# Altium PCB golgi_bot_H_bridge.PcbDoc
Units mil, origin at the board's own origin, x right, y up, seen from the top; angles counter-clockwise.
Board outline 1900 x 1900 mil, 2 copper layers (Top Layer, Bottom Layer); 14 components, 17 nets, 68 pads, 61 vias.
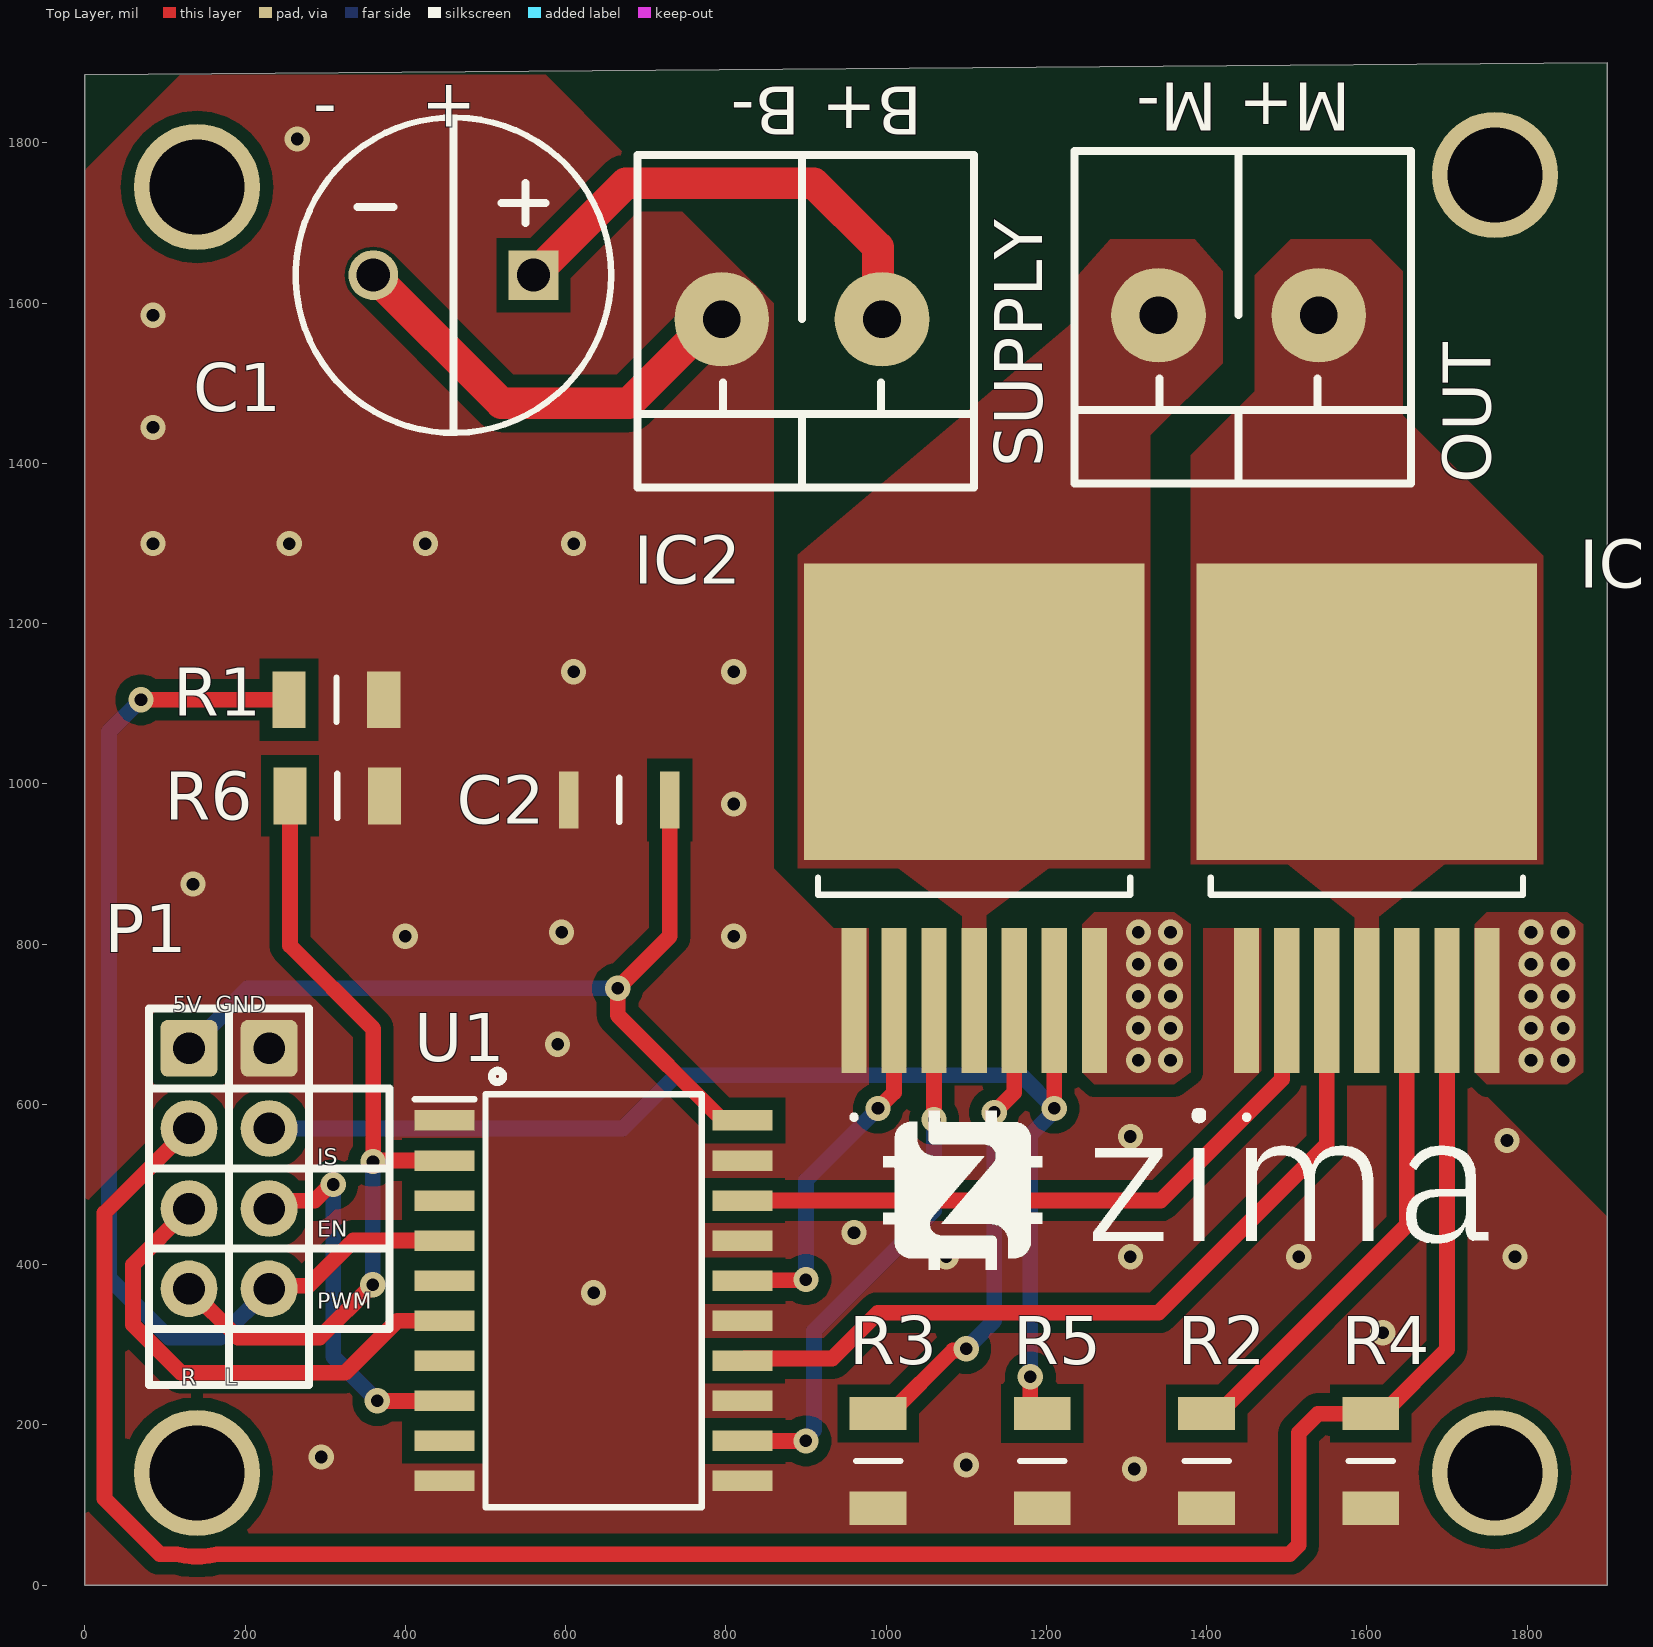
[diagram p0: Top Layer view]
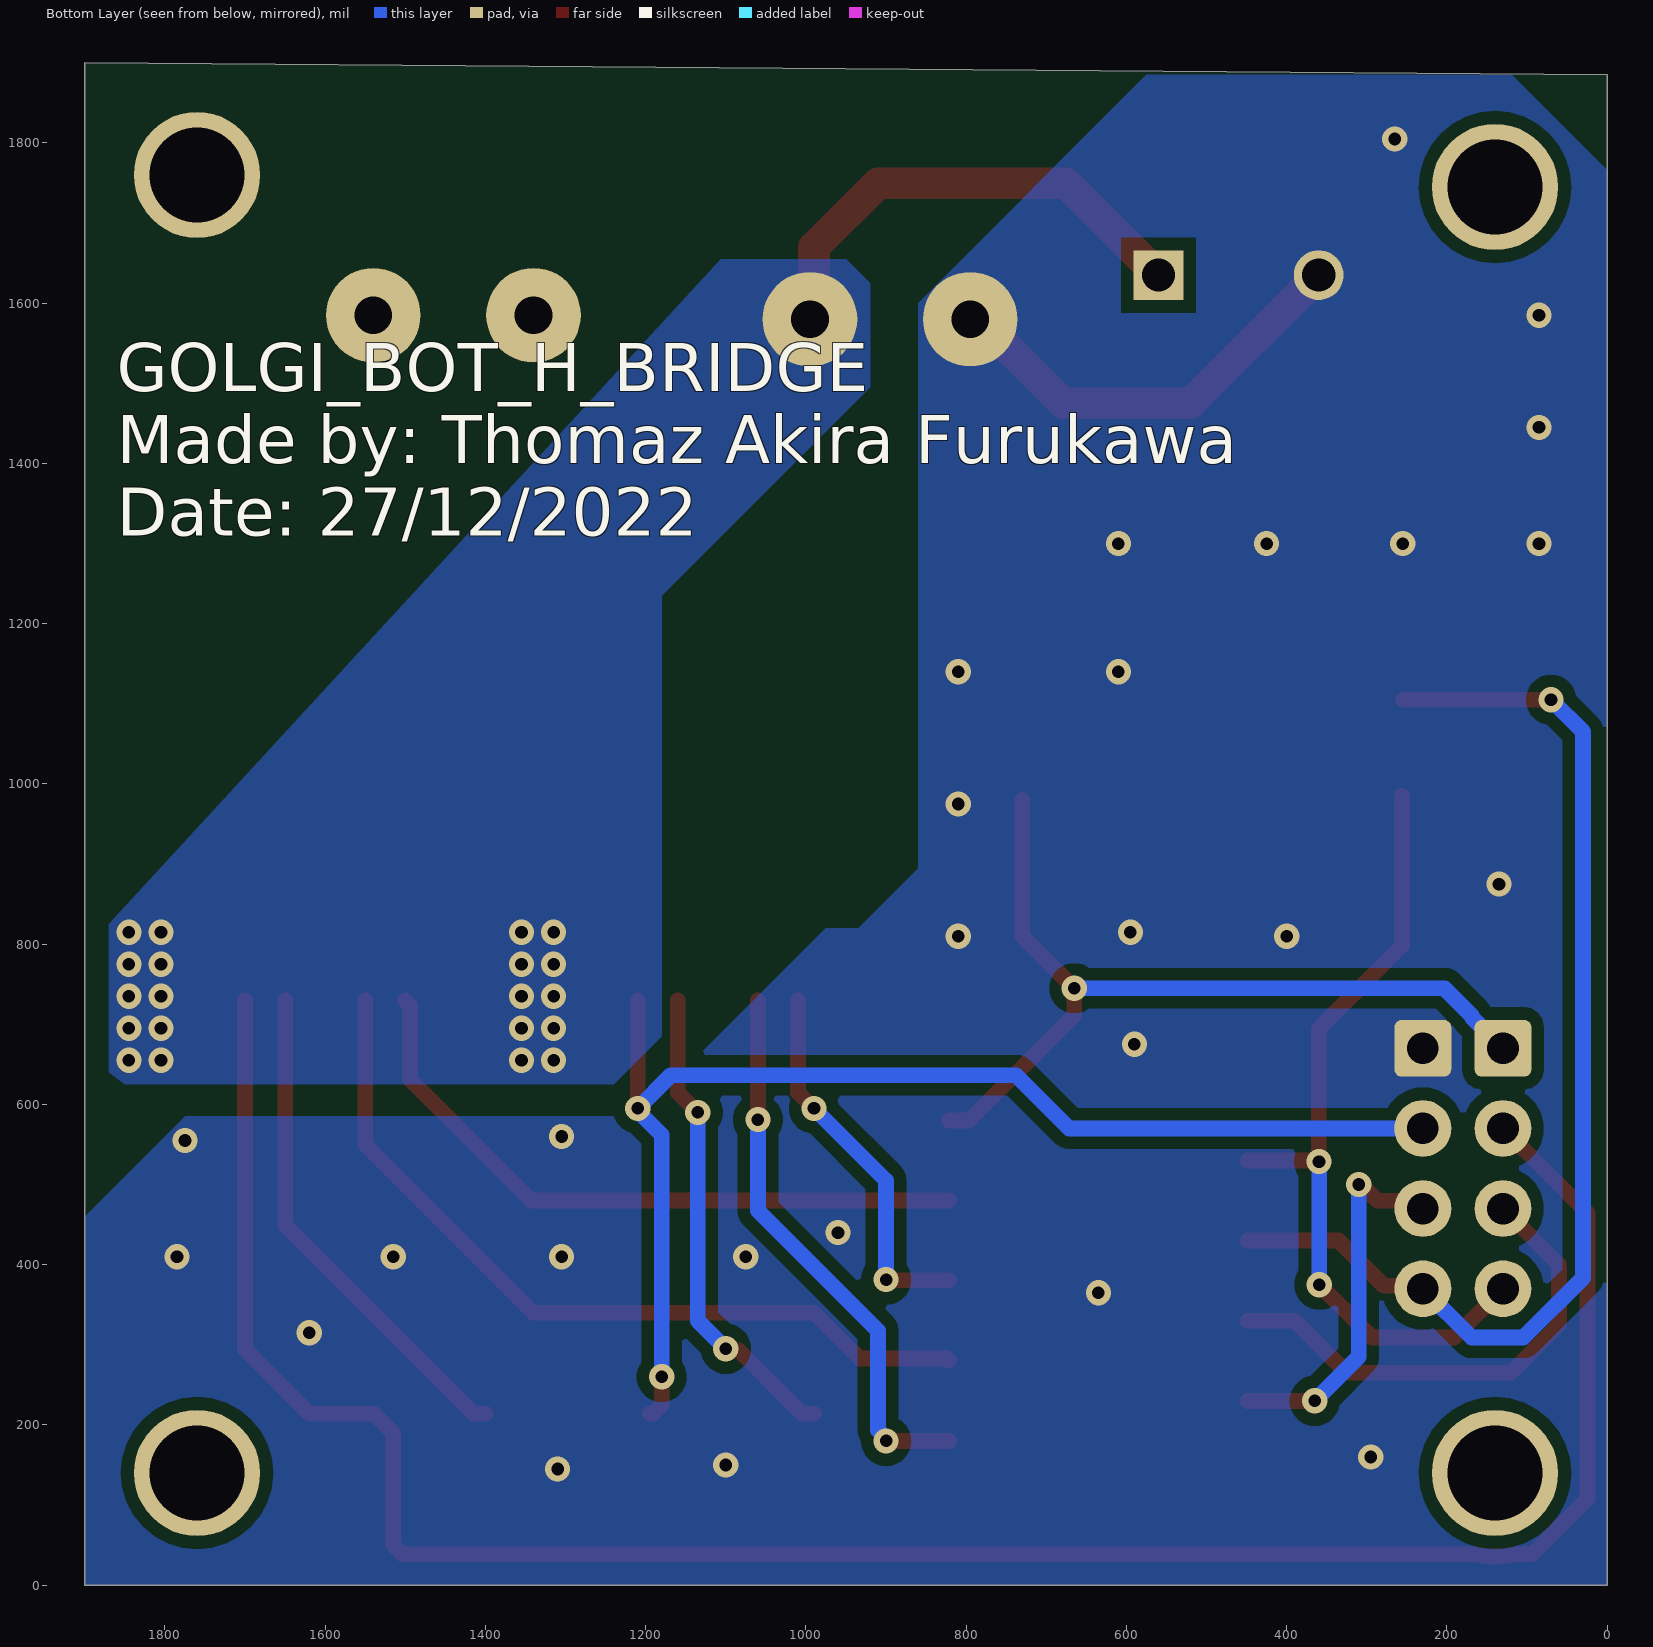
[diagram p1: Bottom Layer view, seen from below]
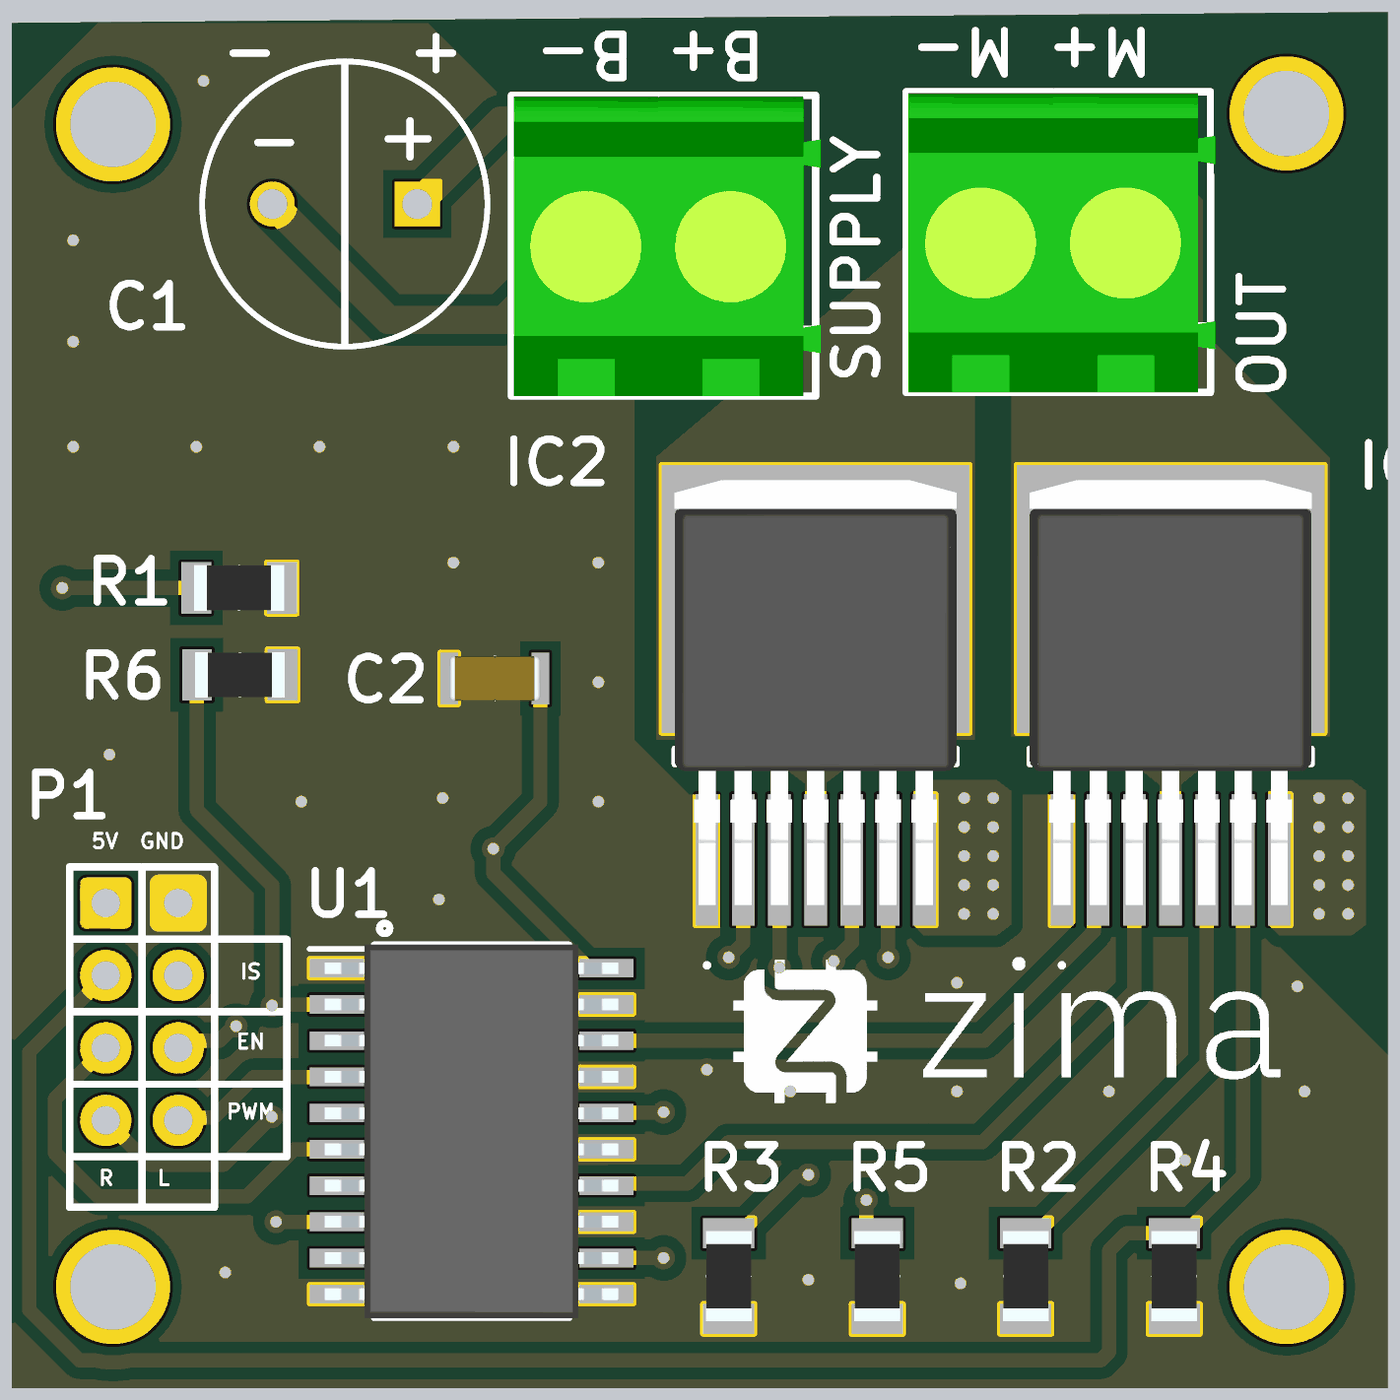
[diagram p2: 3D render of the assembled board from above, using the file's embedded part models]

## Layer stack, top to bottom
Top Solder: solder mask 0.4, Solder Resist, Dk 3.5
Top Layer: signal copper 1.4
Dielectric 1: dielectric 12.6, FR-4, Dk 4.8
Bottom Layer: signal copper 1.4
Bottom Solder: solder mask 0.4, Solder Resist, Dk 3.5

## Board outline
0,0 1900,0 1900,1900 0,1885

## Design rules (kind name [scope] priority, off if disabled: settings)
Clearance [All] p1: gap=15.75 ignorepadtopadclearanceinfootprint=FALSE
ComponentClearance [All] p1: gap=0 collisioncheckmode=3 verticalgap=0 showdistances=FALSE
MinimumSolderMaskSliver [All] p1: minsoldermaskwidth=11.81
PlaneConnect [All] p1: planeconnectstyle=Relief reliefexpansion=20 reliefentries=4 reliefconductorwidth=19.68 reliefairgap=10
PolygonConnect PolygonConnect_4 [InNet('B+')] p1: connectstyle=Direct reliefconductorwidth=10 reliefentries=4 polygonreliefangle="90 Angle" airgapwidth=10
PolygonConnect PolygonConnect_3 [InNet('M+')] p2: connectstyle=Direct reliefconductorwidth=10 reliefentries=4 polygonreliefangle="90 Angle" airgapwidth=10
PolygonConnect PolygonConnect_2 [InNet('M-')] p3: connectstyle=Direct reliefconductorwidth=10 reliefentries=4 polygonreliefangle="90 Angle" airgapwidth=10
PolygonConnect PolygonConnect_1 [All vs InNet('GND')] p4: connectstyle=Direct reliefconductorwidth=0 reliefentries=4 polygonreliefangle="45 Angle" airgapwidth=10
PolygonConnect [All] p5: thpad.connectstyle=Relief thpad.reliefconductorwidth=19.68 thpad.reliefentries=4 thpad.polygonreliefangle="45 Angle" thpad.airgapwidth=10 smdpad.connectstyle=Relief smdpad.reliefconductorwidth=19.68 smdpad.reliefentries=4 smdpad.polygonreliefangle="90 Angle" smdpad.airgapwidth=10 via.connectstyle=Relief via.reliefconductorwidth=19.68 via.reliefentries=4 via.polygonreliefangle="45 Angle" via.airgapwidth=10
RoutingVias [All] p1: holewidth=28 width=50 viastyle="Through Hole" minholewidth=28 minwidth=50 maxholewidth=28 maxwidth=50
SilkToSilkClearance [All] p1: silktosilkclearance=5
SilkToSolderMaskClearance [IsPad] p1: minsilkscreentomaskgap=0 clearancetoexposedcopper=TRUE
SolderMaskExpansion [All] p1: expansion=4 istentingtop=FALSE
Width [All] p1: maxlimit=39.37 minlimit=19.68 preferedwidth=19.68 minimp=50.000000 maximp=50.000000 favimp=50.000000
25 further rules are at their usual default settings.

## Components (designator, comment, footprint, x,y, rotation, side; value= is the part's Value field where it differs from the comment)
C1 "330uF 50V" CAPPRD750W85D1600H1650 560,1635 r180 top
C2 "1uF 50V" CAPC3216X180N 667.01,980 r0 top
IC1 "BTS7960B" BTS7960B 1600,1090 r0 top
IC2 "BTS7960B" BTS7960B 1110,1090 r0 top
OUT "KRE2vias" KRE2-2vias 1440,1585 r0 top
P1 "PIN BAR 2X4" "MALE PIN BAR 2X4" 230,670 r270 top
R1 "10K" RESC3216X60N 314.06,1105 r0 top
R2 "10K" RESC3216X60N 1400,155 r270 top
R3 "10K" RESC3216X60N 990,155 r90 top
R4 "10K" RESC3216X60N 1605,155 r270 top
R5 "10K" RESC3216X60N 1195,155 r90 top
R6 "10K" RESC3216X60N 315,985 r0 top
SUPPLY "KRE2vias" KRE2-2vias 895,1580 r0 top
U1 "74HC244D" SOIC127P1030X250-20N 635,355 r0 top

## Footprints (in the part's own frame and the unit in brackets; to place one, negate y for a bottom-side part, rotate by r counter-clockwise, add the part's x,y. Pads: shape width x height; smd on the part's side, far side on the other; paste and mask are expansions set on the pad)
BTS7960B [mm]
  rect 0.8x4.6 smd: 1(-3.81,-9.15) 2(-2.54,-9.15) 3(-1.27,-9.15) 4(0,-9.15) 5(1.27,-9.15) 6(2.54,-9.15) 7(3.81,-9.15)
  rect 10.8x9.4 smd: 8(0,0)
  silkscreen extent -4.95,-12.9 4.95,-5.25, body extent -4.95,-10.74 4.95,4.16, height 4.4
CAPC3216X180N [mm]
  rect 0.62x1.82 smd: 1(-1.6,0) 2(1.6,0)
  silkscreen extent 0,-0.7 0,0.7, body extent -1.6,-0.8 1.6,0.8, height 1.8
CAPPRD750W85D1600H1650 [mm]
  rect 1.575x1.575 hole 1.05: 1(0,0)
  round 1.575 hole 1.05: 2(5.08,0)
  silkscreen extent -2.46,-5 7.54,5
KRE2-2vias [mm]
  round 3 hole 1.2: 1(-2.54,0) 2(2.54,0)
  silkscreen extent -5.21,-5.33 5.46,5.21, body extent -5.13,-5.33 5.63,5.17, height 14.35
"MALE PIN BAR 2X4" [mm]
  rrect25% 1.8x1.8 hole 1: 1(0,0) 5(0,-2.54)
  round 1.8 hole 1: 2(2.54,0) 3(5.08,0) 4(7.62,0) 6(2.54,-2.54) 7(5.08,-2.54) 8(7.62,-2.54)
  silkscreen extent -1.27,-3.81 8.89,1.27
RESC3216X60N [mm]
  rect 1.05x1.8 smd: 1(-1.5,0) 2(1.5,0)
  silkscreen extent 0,-0.7 0,0.7, body extent -1.58,-0.8 1.58,0.8, height 0.6
SOIC127P1030X250-20N [mm]
  rect 1.9x0.65 smd: 1(-4.725,5.715) 2(-4.725,4.445) 3(-4.725,3.175) 4(-4.725,1.905) 5(-4.725,0.635) 6(-4.725,-0.635) 7(-4.725,-1.905) 8(-4.725,-3.175) 9(-4.725,-4.445) 10(-4.725,-5.715) 11(4.725,-5.715) 12(4.725,-4.445) 13(4.725,-3.175) 14(4.725,-1.905) 15(4.725,-0.635) 16(4.725,0.635) 17(4.725,1.905) 18(4.725,3.175) 19(4.725,4.445) 20(4.725,5.715)
  silkscreen extent -5.68,-6.55 3.42,6.55, body extent -5.15,-6.55 5.15,6.55, height 2.5

## Part data
C1: library part "Capacitor eletrolítico", "capacitor 330uf 50V", Manufacturer_Name=Panasonic, Manufacturer_Part_Number=EEU-TA1H331S, Datasheet Link=http://industrial.panasonic.com/cdbs/www-data/pdf/RDF0000/ABA0000C1212.pdf, Height=16.5mm
C2: library part "Capacitor Cerâmico 1206", "Capacitor", Manufacturer_Name=TDK, Manufacturer_Part_Number=C3216X5R0J226M160AA, Mouser Part Number=810-C3216X5R0J226M-6, Datasheet Link=https://product.tdk.com/info/en/catalog/datasheets/mlcc_commercial_midvoltage_en.pdf, Height=1.8mm, Mouser Price/Stock=https://www.mouser.com/Search/Refine.aspx?Keyword=810-C3216X5R0J226M-6
IC1 IC2: "Integrated Circuit", Manufacturer_Name="Rochester Electronics", Height=4.4mm, Manufacturer_Part_Number=BTS7960B
OUT SUPPLY: "Conector 2 vias", Descrição="Conector KRE 2 vias 180º", Encapsulamento="PTH - 180º", Modelo="2 vias - 180º"
P1: library part "Male pin bar 2x4", Manufacturer=Cromax, Manufacturer Part Number=-, Accessory Type=-, Brand=Cromax, Category="Headers & Wire Housings", ComponentLink1Description=-, ComponentLink1URL=-, Contact Gender="Pin (Female)", Contact Plating=Gold, Contact Type=-, Minimum Order Quantity=1, Mounting Angle=Vertical, Mounting Style="Straight Pin", Number of Positions="40 Position", Number of Rows="1 Row", Pitch="2 mm", Pricing 1="1=1.60, 2=0.80 (BRL)", Product=Headers, Product Category=Accessories, Reeling=False, RoHS="RoHS Compliant", RoHS - Mouser=Y, Row Spacing=-, Stock 1=14, Supplier 1=-, Supplier Part Number 1=-, Termination Style="Through Hole", Type=Breakaway
R1 R2 R3 R4 R5 R6: library part "Resistor 1206", Arrow Part Number=CRCW12064K70FKEA, Manufacturer_Name=Vishay, Mouser Part Number=71-CRCW1206-4.7K-E3, Arrow Price/Stock=https://www.arrow.com/en/products/crcw12064k70fkea/vishay, Datasheet Link=http://docs-emea.rs-online.com/webdocs/13ec/0900766b813ecc08.pdf, Height=0.6mm, Manufacturer_Part_Number=CRCW12064K70FKEA, Mouser Price/Stock=https://www.mouser.co.uk/ProductDetail/Vishay-Dale/CRCW12064K70FKEA?qs=1vm4qhDHCvlKJmatsKzyFQ%3D%3D
U1: "Integrated Circuit", Manufacturer_Name=Toshiba, Mouser Part Number=757-74HC244D, Arrow Part Number=74HC244D, Arrow Price/Stock=https://www.arrow.com/en/products/74hc244d/toshiba?region=nac, Datasheet Link=https://www.arrow.com/en/products/74hc244d/toshiba, Height=2.5mm, Manufacturer_Part_Number=74HC244D, Mouser Price/Stock=https://www.mouser.co.uk/ProductDetail/Toshiba/74HC244D?qs=7EBvPakHacWwVm6mPM9mPg%3D%3D

## Free pads (board coordinates)
  round 157.48 hole 118.11: 1(140,140) 1(140,1745) 1(1760,140) 1(1760,1760)

## Via types
v1: diameter 31.5, hole 15.75, Top Layer to Bottom Layer, tented both sides, 61 vias

## Nets (pads, with @x,y where several pads share a name; then routed paths per layer and width w, separated by ;. In a path a pad name is that pad's centre, name@x,y a point inside that pad or via, vN(x,y) a via of type N, cw(c..) or ccw(c..) an arc to the next point about the centre after c; other vN are vias at no path point)
+5: C2.2 P1.5 U1.20 | length 1073.1
  Top Layer w19.68: C2.2 730,810 v1(665,745) 665,711.42 793.46,582.95 796.42,580 U1.20
  Bottom Layer w19.68: P1.5 168.98,708.98 168.98,710.84 203.13,745 v1(665,745)
B+: C1.1 IC1.7 IC2.7 SUPPLY.2 | length 607
  Top Layer w39.37: C1.1 675,1750 910,1750 989.93,1670.07 989.93,1595.07 SUPPLY.2@1005,1580
  other v1: 1315,655 1355,655 1805,655 1845,655 1315,695 1355,695 1805,695 1845,695 1315,735 1355,735 1805,735 1845,735 1315,775 1355,775 1805,775 1845,775 1315,815 1355,815 1805,815 1845,815
EN_L: P1.3 U1.8 | length 469.2
  Top Layer w19.68: P1.3 239.79,479.79 286.6,479.79 306.8,500 v1(310,500) ; v1(365,230) U1.8
  Bottom Layer w19.68: v1(310,500) 310,285 v1(365,230)
EN_L*: IC2.3 U1.12 | length 695
  Top Layer w19.68: U1.12 v1(900,180) ; v1(1060,581.04) IC2.3
  Bottom Layer w19.68: v1(900,180) 900,183.2 910,193.2 910,317.5 1060,467.5 v1(1060,581.04)
EN_R: P1.7 U1.6 | length 614.7
  Top Layer w19.68: P1.7 60,400 60,325 120,265 325,265 390,330 U1.6
EN_R*: IC1.3 U1.14 | length 1020.6
  Top Layer w19.68: U1.14 823.98,282.95 932.95,282.95 990,340 1340,340 1550,550 IC1.3
GND: C1.2 C2.1 IC1.1 IC2.1 P1.1 R1.2 R2.2 R3.1 R4.2 R5.1 R6.2 SUPPLY.1 U1.1 U1.10 U1.11 U1.13 U1.15 U1.17 U1.19 | length 554.8
  Top Layer w39.37: C1.2 520,1475 678.69,1475 783.69,1580 SUPPLY.1@805,1580
  other v1: 1310,145 1100,150 295,160 1620,315 635,365 1075,410 1305,410 1515,410 1785,410 960,440 1775,555 1305,560 590,675 400,810 810,810 595,815 135,875 810,975 610,1140 810,1140 85,1300 255,1300 425,1300 610,1300 85,1445 85,1585 265,1805
L_IS: IC2.6 P1.2 R5.2 | length 1561.4
  Top Layer w19.68: v1(1180,260) 1180,224.88 1190.83,214.06 R5.2 ; v1(1210,595) IC2.6
  Bottom Layer w19.68: P1.2 671.49,570 737.83,636.34 1168.66,636.34 v1(1210,595) 1210,591.8 1180,561.8 v1(1180,260)
M+: IC1.4 IC1.8 OUT.2
M-: IC2.4 IC2.8 OUT.1
NetIC1_5: IC1.5 R2.1 | length 627.9
  Top Layer w19.68: R2.1 1414.76,214.06 1650,449.29 IC1.5
NetIC2_5: IC2.5 R3.2 | length 603.1
  Top Layer w19.68: R3.2 1004.76,214.06 1083.45,292.74 1097.74,292.74 v1(1100,295) ; v1(1135,590) 1160,615 IC2.5
  Bottom Layer w19.68: v1(1100,295) 1135,330 v1(1135,590)
PWM_L: P1.4 R1.1 U1.4 | length 1422.9
  Top Layer w19.68: v1(70,1105) R1.1 ; P1.4 233.75,373.75 278.75,373.75 335,430 U1.4
  Bottom Layer w19.68: v1(70,1105) 30,1065 30,383.7 104.72,308.98 168.98,308.98 P1.4
PWM_L*: IC2.2 U1.16 | length 473.5
  Top Layer w19.68: U1.16 821.69,380.67 899.33,380.67 v1(900,381.34) ; v1(990,595) 1010,615 IC2.2
  Bottom Layer w19.68: v1(900,381.34) 900,505 v1(990,595)
PWM_R: P1.8 R6.1 U1.2 | length 1024.2
  Top Layer w19.68: P1.8 191.02,308.98 293.2,308.98 v1(359.22,375) ; R6.1 255.94,798.33 360,694.28 360,529.05 v1(359.61,528.66) ; v1@360,530 U1.2
  Bottom Layer w19.68: v1(359.22,375) 359.41,375.2 359.41,528.47 v1(359.61,528.66)
PWM_R*: IC1.2 U1.18 | length 836.6
  Top Layer w19.68: U1.18 1342.73,480 1494.09,631.37 1494.09,723.86 IC1.2
R_IS: IC1.6 P1.6 R4.1 | length 2833.6
  Top Layer w19.68: P1.6 24.57,464.57 24.57,107.89 88,44.46 93.76,38.69 115.08,38.69 ccw(c140,140) 164.92,38.69 1503.47,38.69 1515,50.22 1515,190 1539.06,214.06 1619.76,214.06 1700,294.29 IC1.6
pads on no net: U1.3 U1.5 U1.7 U1.9

## Polygon pours and split planes (outlines as drawn)
GND on Top Layer "GND_L01_P008" (solid, pour order 8): 0,0 1900,0 1900,460 1540,820 935,820 860,895 860,1600 575,1885 119.22,1885 0,1765.78 0,1585
M+ on Top Layer "M+_L01_P001" (solid, pour order 1): 1501.25,900 1585,833 1585,640 1615,640 1615,834 1697.5,900 1820,900 1820,1285 1645,1460 1645,1640 1605,1680 1505,1680 1460,1635 1460,1490 1380,1410 1380,900
M- on Top Layer "M-_L01_P000" (solid, pour order 0): 1095,835 1095,640 1125,640 1125,836.25 1203.33,895 1330,895 1330,1435 1420,1525 1420,1640 1385,1680 1280,1680 1240,1635 1240,1581.89 890,1286.26 890,895 1015,895
B+ on Top Layer "B+_L01_P006" (solid, pour order 6): 1735,640 1750,625 1850,625 1870,640 1870,825 1850,840 1750,840 1735,825
B+ on Top Layer "B+_L01_P004" (solid, pour order 4): 1245,640 1260,625 1360,625 1380,640 1380,825 1360,840 1260,840 1245,825
GND on Bottom Layer "GND_L02_P007" (solid, pour order 7): 975,820 1210,585 1775,585 1900,460 1900,0 0,0 0,1765.78 119.22,1885 575,1885 860,1600 860,895 935,820
B+ on Bottom Layer "B+_L02_P002" (solid, pour order 2): 1850,625 1870,640 1870,825 1106.41,1655 950,1655 920,1625 920,1495 1180,1235 1180,685 1240,625

## Silkscreen, mask and mechanical layers (free items; w line width, h text height)
Top Overlay:
  drawing of 23 lines, arcs and shapes, not listed
  text "M+ M-" at 1580,1875 h60 r180
  text "B+ B-" at 1045,1870 h60 r180
  text "-    +" at 285,1820 h60
  text "5V  GND" at 110,715 h20
  text "IS /  /  / EN /  /  / PWM" at 290,345 h20
  text "R    L" at 120,250 h20
Bottom Overlay:
  text "GOLGI_BOT_H_BRIDGE / Made by: Thomaz Akira Furukawa / Date: 27/12/2022" at 1860,1310 h60